# EAGLE board 15V Power Supply (EAGLE 9.1.1)
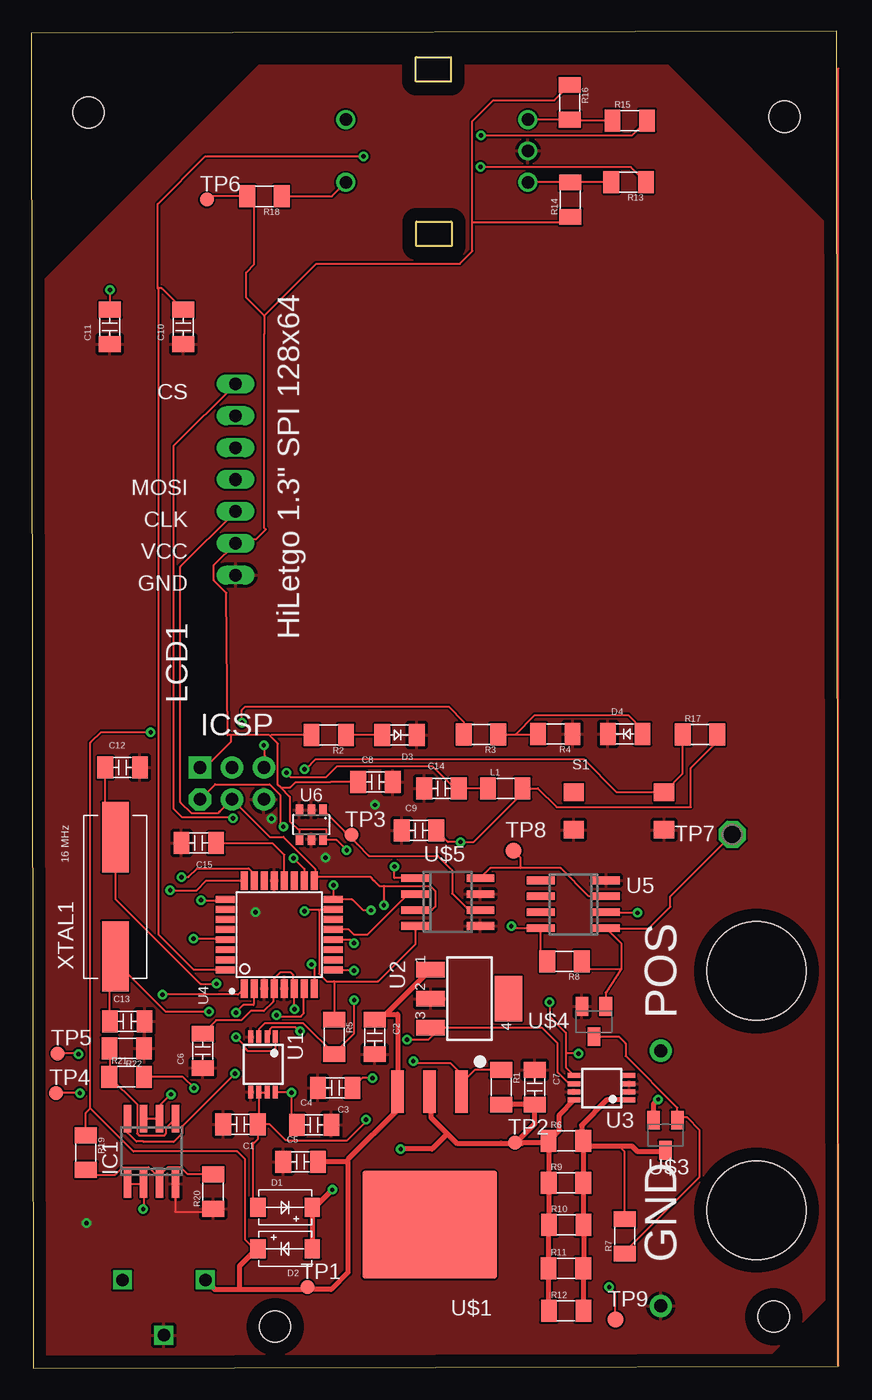
[diagram p0: board, top side]
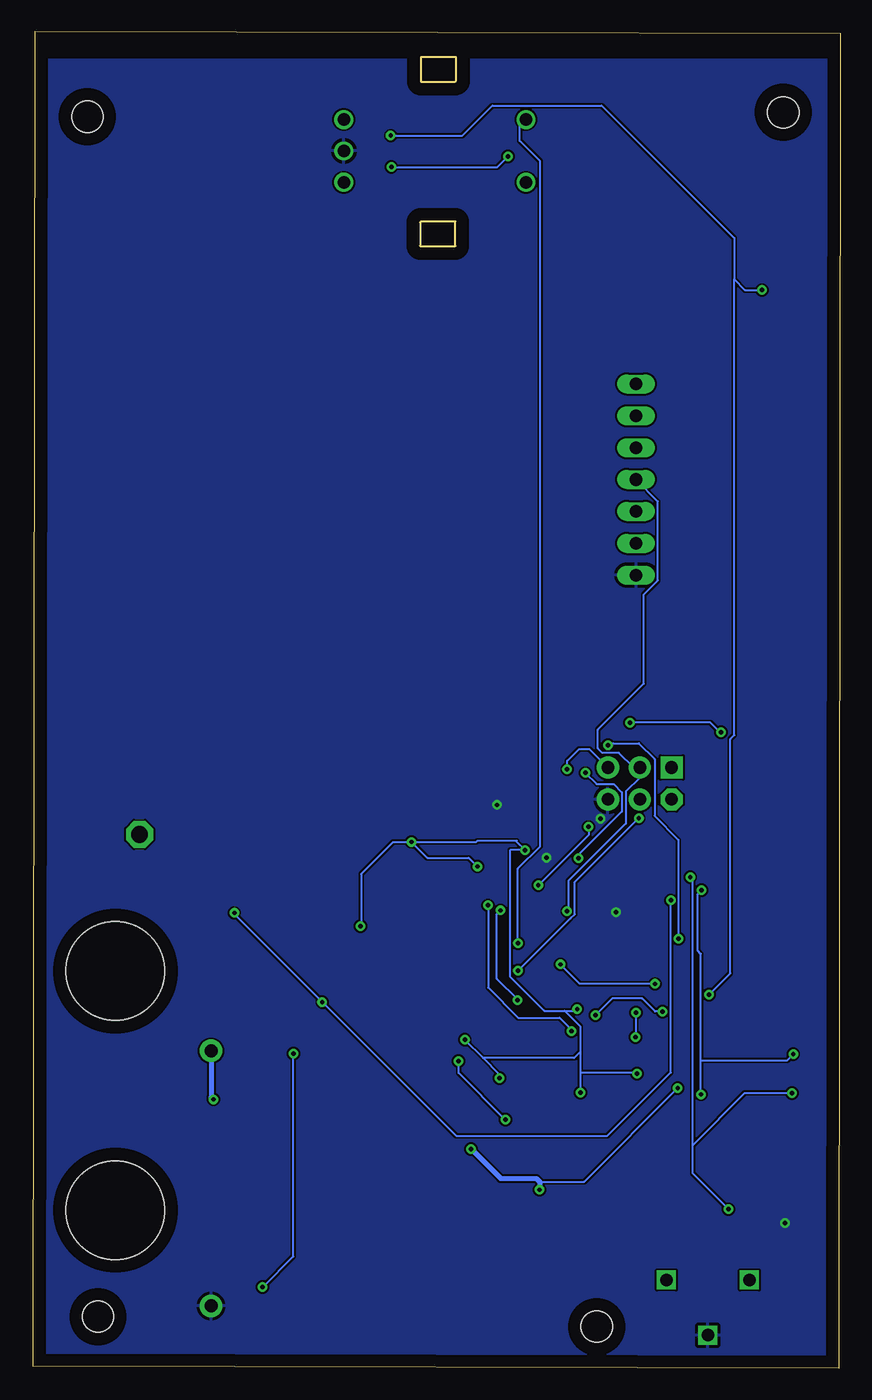
[diagram p1: board, bottom side, seen from below]

Size 64.25 x 106.45 mm. Coordinates in mm from the lower left corner, seen from the top.
Outline: 0.15,0 64.25,0.15 64.1,106.45 0,106.3 0.15,0
Copper layers (1*16): Top 0.035mm / dielectric 1.5mm / Bottom 0.035mm
Design rules "default *": minimum track width 3.5mil, minimum drill 0.2mm, track to track 6mil, track to pad 6mil, pad to pad 6mil, via to via 6mil, smd to smd 6mil, copper to edge 40mil, drill to drill 6mil, minimum pad ring 10mil, minimum via ring 8mil, stop-mask expansion 4mil, vias tented up to drill 0mil, thermal gap 10mil
Holes 2.5 mm at 4.55,100 59.95,99.65 59.1,4.1 19.4,3.3

## Footprints (pad centres in the part's own frame; a part is rotated, then mirrored left to right if it is on the bottom)
2.1BARRELJACK = drill 1 square: GND$1 4.4,0; GND$2 0,-3.3; POS 0,3.3
1206CAP = smd 1.25 x 1.75: P$1 1.375,0; P$2 -1.375,0
DO-221AC-2 = smd 1.2 x 1.52: A$1 -2.16,0; C$1 2.16,0
1206 = smd 1.25 x 1.75: P$1 1.375,0; P$2 -1.375,0
SO08 = smd 0.6 x 2.2: 1 -1.905,-2.6; 2 -0.635,-2.6; 3 0.635,-2.6; 4 1.905,-2.6; 5 1.905,2.6; 6 0.635,2.6; 7 -0.635,2.6; 8 -1.905,2.6
HILETGOSPILCD = drill 1 long: CLK -2.54,2.54; CS 7.62,2.54; DC 5.08,2.54; GND -7.62,2.54; P$1.MOSI 0,2.54; RES 2.54,2.54; VCC -5.08,2.54
TL3305 = smd 1.6 x 1.4: P$1 -3.6,-1.5; P$2 3.6,-1.5; P$3 -3.6,1.5; P$4 3.6,1.5
TP11R = smd 1.1 x 1.1: TP 0,0
P1-13 = drill 1.321 pad 2.159 octagon: TP 0,0
B1,27 = smd 1.27 x 1.27: TP 0,0
DGK_S-PDSO-G8 = smd 0.4 x 1: 1 -0.975,-2.2; 2 -0.325,-2.2; 3 0.325,-2.2; 4 0.975,-2.2; 5 0.975,2.2; 6 0.325,2.2; 7 -0.325,2.2; 8 -0.975,2.2
SOT223 = smd 1.219 x 2.235: 1 -2.311,-3.099; 2 0,-3.099; 3 2.311,-3.099 | smd 3.6 x 2.2: 4 0,3.099
QFP80P900X900X120-32N = smd 1.5 x 0.55: 1 -4.3,2.8; 2 -4.3,2; 3 -4.3,1.2; 4 -4.3,0.4; 5 -4.3,-0.4; 6 -4.3,-1.2; 7 -4.3,-2; 8 -4.3,-2.8; 17 4.3,-2.8; 18 4.3,-2; 19 4.3,-1.2; 20 4.3,-0.4; 21 4.3,0.4; 22 4.3,1.2; 23 4.3,2; 24 4.3,2.8 | smd 0.55 x 1.5: 9 -2.8,-4.3; 10 -2,-4.3; 11 -1.2,-4.3; 12 -0.4,-4.3; 13 0.4,-4.3; 14 1.2,-4.3; 15 2,-4.3; 16 2.8,-4.3; 25 2.8,4.3; 26 2,4.3; 27 1.2,4.3; 28 0.4,4.3; 29 -0.4,4.3; 30 -1.2,4.3; 31 -2,4.3; 32 -2.8,4.3
SO8 = smd 0.6 x 2.2: 1 -1.905,-2.6; 2 -0.635,-2.6; 3 0.635,-2.6; 4 1.905,-2.6; 5 1.905,2.6; 6 0.635,2.6; 7 -0.635,2.6; 8 -1.905,2.6
SOT23-6 = smd 0.6 x 0.9: 1 -0.95,-1.15; 2 0,-1.15; 3 0.95,-1.15; 4 0.95,1.15; 5 0,1.15; 6 -0.95,1.15
LM317KTTR = smd 1 x 3.4: ADJ -2.54,-10.6; IN 2.54,-10.6; OUT 0,-10.6 | smd 10.7 x 8.6: THEPAD 0,0
PEC11R-4 = drill 1: GND 0,-7.5; S$1 -2.5,7; S$2 2.5,7; TERA -2.5,-7.5; TERB 2.5,-7.5
SC59-EBC = smd 1 x 1.5: B -0.95,-1.2; C 0,1.2; E 0.95,-1.2
ISCP-PORT = drill 1 pad 1.778 octagon: P$1 -2.54,0 | drill 1 pad 1.778 square: P$2 -2.54,2.54 | drill 1 pad 1.778: P$3 0,0; P$4 0,2.54; P$5 2.54,2.54; P$6 2.54,0
CT2232 = drill 1.029 pad 1.778: GND 16.51,-7.62; P$1 -3.81,-7.62 | hole 7.874: -10.16,0; 8.89,0
HC/49US = smd 5.6 x 2.1: P$1 -4.75,0; P$2 4.75,0

## Placement (x,y rotation side)
B1  15V  [2.1BARRELJACK]  10.55,7.02 270 top
C1  .1u  [1206CAP]  16.65,19.42 180 top
C2  .1u  [1206CAP]  27.32,26.37 270 top
C3  22u  [1206CAP]  24.19,22.32 180 top
C4  .1u  [1206CAP]  22.51,19.37 0 top
C5  .1u  [1206CAP]  21.43,16.42 0 top
C6  .1u  [1206CAP]  13.65,25.27 90 top
C7  1u  [1206CAP]  40.07,22.37 270 top
C8  1u  [1206CAP]  27.39,46.67 0 top
C9  .1u  [1206CAP]  30.86,42.82 0 top
C10  .1u  [1206CAP]  12.08,82.92 90 top
C11  .1u  [1206CAP]  6.25,82.92 90 top
C12  22p  [1206CAP]  7.26,47.82 0 top
C13  22p  [1206CAP]  7.63,27.62 0 top
C14  .1u  [1206CAP]  32.65,46.17 0 top
C15  .1u  [1206CAP]  13.32,41.82 180 top
D1  VS-2EJH01HM3  [DO-221AC-2]  20.2,12.8 0 top
D2  VS-2EJH01HM3  [DO-221AC-2]  20.2,9.5 180 top
D3  [1206]  29.3,50.41 180 top
D4  [1206]  47.27,50.51 0 top
IC1  LM1458D  [SO08]  9.57,17.28 0 top
L1  1206-INDUCTOR  [1206]  37.73,46.17 0 top
LCD1  HILETGOSPILCD  [HILETGOSPILCD]  18.8,70.76 90 top
R1  590  [1206]  37.4,22.37 270 top
R2  1k  [1206]  23.67,50.42 180 top
R3  1K  [1206]  35.79,50.47 180 top
R4  500  [1206]  41.71,50.5 180 top
R5  1k  [1206]  24.1,26.38 270 top
R6  .5  [1206]  42.55,18.1 0 top
R7  1k  [1206]  47.22,10.5 90 top
R8  5k  [1206]  42.44,32.4 180 top
R9  .5  [1206]  42.56,14.75 0 top
R10  .5  [1206]  42.58,11.4 0 top
R11  .5  [1206]  42.55,7.95 0 top
R12  .5  [1206]  42.57,4.55 0 top
R13  10k  [1206]  47.54,94.45 180 top
R14  10k  [1206]  42.91,93.05 90 top
R15  10k  [1206]  47.63,99.35 0 top
R16  10k  [1206]  42.85,100.8 270 top
R17  2k  [1206]  53.22,50.45 0 top
R18  10k  [1206]  18.56,93.31 180 top
R19  [1206]  4.34,17.16 270 top
R20  [1206]  14.46,14.06 90 top
R21  [1206]  7.58,23.21 0 top
R22  [1206]  7.6,25.46 180 top
S1  TL3305  [TL3305]  46.76,44.36 0 top
TP1  TPTP11R  [TP11R]  21.96,6.46 0 top
TP2  TPTP11R  [TP11R]  38.48,17.96 0 top
TP3  TPTP11R  [TP11R]  25.5,42.46 0 top
TP4  TPTP11R  [TP11R]  1.97,21.91 0 top
TP5  TPTP11R  [TP11R]  2.09,25.06 0 top
TP6  TPTP11R  [TP11R]  13.96,93.06 0 top
TP7  TPPAD1-13  [P1-13]  55.79,42.5 0 top
TP8  TPB1,27  [B1,27]  38.36,41.2 0 top
TP9  TPB1,27  [B1,27]  46.48,3.85 0 top
U1  MCP4151T-502E/MS  [DGK_S-PDSO-G8]  18.44,24.19 180 top
U2  MCP5209-5.0YS  [SOT223]  34.87,29.42 270 top
U3  AD8418BZR  [DGK_S-PDSO-G8]  45.39,22.32 90 top
U4  ATMEGA328PB-AN  [QFP80P900X900X120-32N]  19.73,34.52 90 top
U5  LM393  [SO8]  43.15,36.93 90 top
U6  MCP1501T-40E/CHY  [SOT23-6]  22.28,43.28 180 top
U$1  LM317KTTR  [LM317KTTR]  31.7,11.42 180 top
U$2  PEC11R  [PEC11R-4]  32.03,96.93 90 top
U$3  DS31830  [SC59-EBC]  50.48,18.55 180 top
U$4  MMBT3904  [SC59-EBC]  44.77,27.6 180 top
U$5  MCP4921-E/SN  [SO8]  33.14,37.12 270 top
U$6  ICSP-HEADER  [ISCP-PORT]  15.97,45.29 0 top
U$7  BINDINGPOST  [CT2232]  57.72,21.46 270 top
XTAL1  16 MHz  [HC/49US]  6.68,37.53 90 top

## Library data of the parts
B1 = Booster Parts
C1-C15 = 1206CAP
D1 D2 U1 U$1 U$3 U$4 U$7 = LM317
D3 D4 = 1206LED
IC1 = linear
L1 LCD1 S1 U2 U3 U5 U6 U$2 U$5 U$6 XTAL1 = ATMEGA328PB-AN
R1-R22 = 1206 Resistor
TP1-TP9 = testpad
U4 = ATMEGA328PB-AN; AVAILABILITY: Good; DESCRIPTION: AVR microcontroller; EEPROM: 1024B; SRAM: 2kB; Flash: 32kB; TQFP32; MF: Microchip; MP: ATMEGA328PB-AN; PACKAGE: TQFP-32 Microchip; PRICE: 1.36 USD

## Nets
5V: C3.P$2 C4.P$2 C6.P$1 C8.P$2 C9.P$1 IC1.8 L1.P$1 LCD1.VCC R2.P$1 R8.P$1 R14.P$2 R16.P$2 R17.P$1 R18.P$1 TP6.TP U1.8 U2.3 U3.6 U4.4 U4.6 U5.8 U6.4 U6.6 U$5.1 U$6.P$2
15V: B1.POS C2.P$2 C5.P$1 D2.C$1 R3.P$1 R19.P$2 TP1.TP U2.1 U$1.IN
BASE: R8.P$2 TP7.TP U5.1 U$4.B
CS1: U1.1 U4.2
CS2: U4.13 U$5.2
CS3: LCD1.CS U4.9
CUR: TP9.TP U3.5 U4.25 U5.2
ENCODE-A: C10.P$1 R13.P$2 U4.32
ENCODE-B: C11.P$1 R15.P$1 U4.1
GND: B1.GND$1 C1.P$1 C2.P$1 C3.P$1 C4.P$1 C5.P$2 C6.P$2 C7.P$2 C8.P$1 C9.P$2 C10.P$2 C11.P$2 C12.P$1 C13.P$1 C14.P$2 C15.P$1 D3.P$2 D4.P$2 IC1.4 LCD1.GND R4.P$2 R20.P$2 R22.P$2 S1.P$1 S1.P$2 U1.4 U1.5 U2.2 U3.2 U3.3 U3.7 U4.3 U4.5 U4.21 U5.4 U6.2 U6.3 U6.5 U$2.GND U$4.E U$5.5 U$5.7 U$6.P$6 U$7.GND
MOSI: LCD1.P$1.MOSI R5.P$2 U4.15 U$5.4 U$6.P$4
N$1: D4.P$1 R3.P$2 R4.P$1
N$2: U$3.E U$7.P$1
N$3: C1.P$2 D1.A$1 R1.P$2 U1.6 U1.7 U$1.ADJ
N$4: TP3.TP U6.1 U$5.6
N$6: D3.P$1 R2.P$2
N$7: C14.P$1 L1.P$2 U4.18
N$8: C13.P$2 U4.7 XTAL1.P$1
N$9: TP8.TP U5.3 U$5.8
N$10: R6.P$1 R7.P$1 R9.P$1 R10.P$1 R11.P$1 R12.P$1 U3.1 U$3.C
N$11: R13.P$1 R14.P$1 U$2.TERA
N$12: R15.P$2 R16.P$1 U$2.TERB
N$13: C12.P$2 U4.8 XTAL1.P$2
N$14: R7.P$2 U$3.B U$4.C
N$16: C15.P$2 U4.20
N$18: R18.P$2 U$2.S$1
N$20: IC1.3 R19.P$1 R20.P$1
N$22: IC1.5 R21.P$2 R22.P$1
OP15: IC1.1 IC1.2 TP4.TP U4.23
OPOUT: IC1.6 IC1.7 TP5.TP U4.24
OUT: C7.P$1 D1.C$1 D2.A$1 R1.P$1 R6.P$2 R9.P$2 R10.P$2 R11.P$2 R12.P$2 R21.P$1 TP2.TP U3.8 U$1.OUT
RESET: R17.P$2 S1.P$4 U4.29 U$6.P$5
SCK: LCD1.CLK U1.2 U4.17 U$5.3 U$6.P$3
SDO/SDI: R5.P$1 U1.3 U4.16 U$6.P$1
SW1: U4.12 U$2.S$2

## Tracks (layer width: path | path; a pad name or v marks a point on that pad's centre or on a via)
5V  (via drill 0.35)
  Top 0.152: v20.95,28.6 20.93,28.62 U4.6 20.85,30.3 20.85,31.3 20.65,31.5 19.8,31.5 19.33,31.03 U4.4 19.23,30.12 19.23,29.16 18.51,28.44 17.45,28.44 16.7,27.7 14.75,27.7 | 21.33,42.8 21.33,42.9 23.5,42.9 23.5,42.4 U6.6 23.31,42.05 24.3,42.05 v25.1,41.25 | 21.33,42.8 U6.4 | U$5.1 28.9,39.02 v28.9,39.95 | v29.9,26.15 31.57,26.15 32.53,27.11 U2.3 40.65,27.1 41.9,25.85 41.9,23.55 42.8,22.64 U3.6 | v38.2,35.2 38.38,35.02 U5.8 40.55,32.91 R8.P$1 | U1.8 19.45,21.95 v20.7,21.95 20.7,19.8 C4.P$2 | 19.84,46.24 20.58,45.5 20.58,43.55 21.33,42.8 | 19.84,46.24 19.63,46.45 19.63,49.73 19.03,50.33 | 19.03,50.33 18.95,50.41 15.91,50.41 | v27.15,23.1 26.34,23.1 C3.P$2 | U$6.P$2 13.83,47.83 15.91,49.91 15.91,50.41 | R16.P$2 41.62,100.95 36.75,100.95 35.1,99.3 35.1,91.2 | 19.84,46.24 20.6,46.24 21.03,46.67 23.83,46.67 C8.P$2 | C9.P$1 33.16,41.9 v34.15,41.9 35.2,41.9 39.1,45.8 L1.P$1 40.33,46.17 41.81,44.68 52.49,44.68 52.49,47.8 54.59,49.9 R17.P$1 | 18.54,83.8 18.54,82.35 18.54,66.91 18.66,66.78 17.86,65.98 16.56,65.98 LCD1.VCC 14.52,63.94 14.52,62.73 15.52,61.74 15.62,50.41 15.91,50.41 | 35.1,91.2 35.1,88.95 34.1,87.95 22.68,87.95 18.54,83.8 | 18.54,83.8 17.08,85.25 17.08,87.25 17.73,87.9 17.73,93.86 R18.P$1 14.21,93.31 TP6.TP | R2.P$1 19.12,50.42 19.03,50.33 | 42.43,91.2 R14.P$2 42.43,91.2 | 14.75,27.7 | 14.75,27.7 14.7,27.7 | 14.14,27.14 C6.P$1 14.7,27.7 | v16.2,23.45 12,19.25 12,18.68 11.32,18 8.95,18 8.9,18.05 8.35,18.05 7.67,18.73 IC1.8 | 14.75,27.7 14.7,27.7 | 42.43,91.2 35.1,91.2
  Bottom 0.152: 21.95,28.45 21.1,28.45 v20.95,28.6 | 21.95,28.45 20.7,27.2 20.7,25.2 | 20.7,25.2 20.7,23.55 | 20.7,23.55 v20.7,21.95 | v34.15,41.9 35.6,41.9 38.15,39.35 38.15,35.25 v38.2,35.2 | v34.15,41.9 29,41.9 28.9,42 28.7,42 25.75,42 25.75,41.9 v25.1,41.25 26.27,41.25 26.27,31.15 23.57,28.45 21.95,28.45 | 28.45,24.7 21.2,24.7 20.7,25.2 | 28.45,24.7 v29.9,26.15 | 28.45,24.7 | 28.45,24.7 27.15,23.4 v27.15,23.1 | v34.15,41.9 32.89,40.64 29.59,40.64 v28.9,39.95 | 20.7,23.55 16.3,23.55 v16.2,23.45
15V  (via drill 0.35)
  Top 0.152: TP1.TP 22.05,6.37 22.05,6.27 | 17.88,9.34 17.83,9.39 17.01,10.22 17.01,16.62 16.37,17.26 8.12,17.26 4.7,20.68 | 4.7,20.68 4.7,49.81 5.54,50.65 v9.5,50.65 | R19.P$2 4.34,20.32 4.7,20.68 | R3.P$1 34.41,51.47 33.21,52.67 17.02,52.67 16.75,52.4 v16.75,51.4 | 25.2,16.61 25.2,16.42
  Top 0.406: 28.21,28.17 U2.1 | 16.55,6.27 14.6,6.27 B1.POS | 16.55,6.27 22.05,6.27 23.85,6.27 25.2,7.62 25.2,16.42 C5.P$1 | 25.2,16.61 29.16,20.57 U$1.IN 29.16,28.17 28.21,28.17 | C2.P$2 27.74,28.17 28.21,28.17 | D2.C$1 17.88,9.34 | 16.55,6.27 16.55,8.11 17.83,9.39
  Bottom 0.152: v16.75,51.4 10.35,51.4 9.6,50.65 v9.5,50.65
BASE
  Top 0.152: 46.95,31.79 45.72,29.88 U$4.B | 46.95,31.79 46.95,33.83 U5.1 49.15,35.02 50.87,36.74 50.87,37.58 TP7.TP | R8.P$2 44.43,31.79 46.95,31.79
CS1  (via drill 0.35)
  Top 0.152: U1.1 19.41,25.41 19.27,25.27 17.19,25.27 16.93,25.53 16.93,25.72 v16.3,26.35 | v16.28,28.32 16.88,28.92 17.68,28.92 17.73,28.97 U4.2
  Bottom 0.152: v16.28,28.32 16.3,28.3 v16.3,26.35
CS2
  Top 0.152: U4.13 25.28,34.92 25.7,34.51 26.74,34.51 29.99,37.76 U$5.2
CS3  (via drill 0.35)
  Top 0.152: LCD1.CS 11.35,73.47 11.35,44.52 12,43.87 15.98,43.87 v16.05,43.8 | U4.9 25.6,31.72 v25.67,31.65
  Bottom 0.152: v25.67,31.65 21.52,35.79 21.5,35.79 21.14,36.15 21.14,38.73 16.2,43.67 16.18,43.67 v16.05,43.8
CUR  (via drill 0.35)
  Top 0.152: 42.54,25.05 42.54,26.71 41.25,28 v41.25,29.15 | 42.54,25.05 42.54,23.95 U3.5 | v13.5,37.25 15.36,37.25 U4.25 | v48.25,36.25 45.8,36.25 U5.2 | TP9.TP 46.48,5.97 v46,6.45 | v43.55,25.05 42.54,25.05
  Bottom 0.152: v13.5,37.25 13.5,23.55 18.55,18.5 30.6,18.5 v41.25,29.15 48.25,36.15 v48.25,36.25 | v46,6.45 43.55,8.9 v43.55,25.05
ENCODE-A  (via drill 0.35)
  Top 0.152: U4.32 12.92,31.72 10.15,34.49 10.15,86 | R13.P$2 47.71,95.65 v35.75,95.65 | v26.45,96.5 13.85,96.5 10.05,92.7 10.05,86 10.15,86 | C10.P$1 10.38,86 10.15,86
  Bottom 0.152: v35.75,95.65 27.3,95.65 v26.45,96.5
ENCODE-B  (via drill 0.35)
  Top 0.152: U4.1 16.46,29.75 v10.45,29.75 | R15.P$1 47.8,98.15 v35.8,98.15 | v6.25,85.85 C11.P$1
  Bottom 0.152: v35.8,98.15 30.1,98.15 27.7,100.55 19,100.55 8.45,90 8.45,86.7 | v10.45,29.75 8.75,31.45 8.75,50.1 8.45,50.4 8.45,86.7 | 8.45,86.7 7.6,85.85 v6.25,85.85
GND  (via drill 0.35)
  Top 0.152: IC1.4 11.45,14.65 11.45,12.45 14.22,12.45 R20.P$2
  other vias: 19.1,43.75 27.35,44.85 4.4,11.55 17.85,36.3 23.4,40.65
  pour Top: 0.35,0.2 57.95,0.2 64.05,6.3 64.05,90.35 50.7,103.7 18.1,103.7 0.35,85.95 0.35,0.4
  pour Bottom: 64.35,104.2 64.7,103.85 64.7,0.4 64.5,0.2 0.55,0.2 0.35,0 0.35,103.85 0.85,104.2
MOSI  (via drill 0.35)
  Top 0.152: 24.1,30.8 23.5,30.8 22.9,31.4 22.9,36.4 23.02,36.52 U4.15 21.87,36.52 v21.75,36.4 | 24.1,30.8 27.6,30.8 30.54,33.74 U$5.4 | 24.1,30.8 R5.P$2
  Bottom 0.152: LCD1.P$1.MOSI 14.52,69.02 14.52,62.73 15.65,61.61 15.65,54.51 19.31,50.85 19.31,49.35 18.95,48.99 17.63,48.99 16.47,47.83 U$6.P$4 15.95,47.81 15.95,47.04 17.09,45.9 17.09,43.36 21.65,38.8 21.65,36.5 v21.75,36.4
N$1
  Top 0.152: R3.P$2 38.55,50.47 | 38.55,50.47 40.3,50.47 R4.P$1 | 38.55,50.47 40.08,52 47.5,52 48.64,50.85 D4.P$1
N$2  (via drill 0.35)
  Top 0.406: U$3.E 49.53,21.03 v49.9,21.4
  Bottom 0.406: U$7.P$1 50.1,21.6 v49.9,21.4
N$3  (via drill 0.35)
  Top 0.152: U1.7 18.8,21.95 18.15,21.95 U1.6 18.11,19.33 C1.P$2 | 34.24,22.7 34.24,23.41 33.35,24.3 30.55,24.3 v30.4,24.45 | 34.24,22.7 U$1.ADJ | v26.65,19.8 26.65,19.65 25.15,18.15 20.35,18.15 20.23,18.15 18.96,19.42 C1.P$2 | D1.A$1 17.64,13.2 17.64,17.95 17.69,17.9 18.02,18.23 C1.P$2 | R1.P$2 35.28,23.75 34.24,22.7
  Bottom 0.152: v30.4,24.45 30.4,23.5 26.72,19.82 26.7,19.8 v26.65,19.8
N$4
  Top 0.152: U$5.6 34.81,36.48 34.63,36.67 33.5,37.8 33.5,39.65 32.35,40.8 26.86,40.8 25.93,41.73 24.93,42.73 | U6.1 24.93,42.73 | TP3.TP 25.2,42.46 24.93,42.73
N$5
  Top 0.152: 64.25,0.2 64.25,103.5
N$6
  Top 0.152: D3.P$1 R2.P$2
N$7  (via drill 0.35)
  Top 0.152: L1.P$2 C14.P$1 33.7,46.17 31.95,47.92 24.32,47.92 23.45,47.05 20.65,47.05 v20.3,47.4 | U4.18 21.73,39.76 20.9,40.59 v20.85,40.59
  Bottom 0.152: v20.85,40.59 20.85,40.87 17.39,44.33 17.39,45.85 18.05,46.51 19.41,46.51 v20.3,47.4
N$8  (via drill 0.35)
  Top 0.152: U4.7 21.7,30.19 21.7,28.25 21.45,28 21.21,28 21.2,27.99 19.61,27.99 v19.5,28.1 | C13.P$2 6.26,32.35 XTAL1.P$1 6.68,32.38 10.66,28.4 v14.15,28.4
  Bottom 0.152: v14.15,28.4 14.75,28.4 15.78,29.43 18.17,29.43 v19.5,28.1
N$9
  Top 0.152: U$5.8 36.54,39.83 38.95,39.83 | U5.3 44.38,37.56 42.12,39.83 38.95,39.83 | 38.95,39.83 38.95,40.61 TP8.TP
N$10
  Top 0.152: R7.P$1 47.22,17.23 46.75,17.7
  Top 0.406: U3.1 45.8,21.34 43.8,19.35 43.8,18.23 R6.P$1 | R6.P$1 R9.P$1 43.93,11.42 R10.P$1 43.95,7.98 R11.P$1 43.92,4.57 R12.P$1 | U$3.C 50.58,17.25 48.24,17.25 47.8,17.7 46.75,17.7 44.32,17.7 R6.P$1
N$11
  Top 0.152: U$2.TERA R14.P$1 42.93,94.45 R13.P$1
N$12
  Top 0.152: R15.P$2 42.92,99.35 R16.P$1 U$2.TERB
N$13  (via drill 0.35)
  Top 0.152: C12.P$2 5.89,43.08 XTAL1.P$2 6.68,37.38 13.46,30.6 v14.75,30.6 | v22.29,32.15 22.53,31.91 U4.8
  Bottom 0.152: v14.75,30.6 20.74,30.6 v22.29,32.15
N$14
  Top 0.152: U$4.C 46.76,26.4 47.31,25.85 47.31,24.84 51.43,20.73 51.43,19.95 | U$3.B 51.43,19.95 | R7.P$2 47.22,9.27 53.2,15.25 53.2,18.95 52.2,19.95 51.43,19.95
N$16
  Top 0.152: C15.P$2 14.71,41.8 19.2,41.8 20.13,40.87 U4.20
N$18
  Top 0.152: R18.P$2 23.91,93.31 U$2.S$1
N$20
  Top 0.152: R19.P$1 4.73,15.4 6.66,15.4 7.27,16.01 9.33,16.01 9.94,15.4 10.25,15.4 | 10.25,15.4 10.25,14.72 IC1.3 | R20.P$1 12.44,15.44 11.87,16.01 10.86,16.01 10.25,15.4
N$22
  Top 0.152: R22.P$1 6.23,23.23 R21.P$2 8.41,21.01 8.41,18.68 8.54,18.55 10.6,18.55 10.73,18.68 10.73,19.14 IC1.5
OP15  (via drill 0.35)
  Top 0.152: IC1.1 IC1.2 8.94,12.69 v8.9,12.65 | U4.23 17.73,39.37 17.3,39.8 13.2,39.8 12.5,39.1 v11.95,39.1 | v3.85,21.9 TP4.TP
  Bottom 0.152: v8.9,12.65 11.75,15.5 11.75,17.75 | 11.75,17.75 11.75,38.9 v11.95,39.1 | 11.75,17.75 7.6,21.9 v3.85,21.9
OPOUT  (via drill 0.35)
  Top 0.152: IC1.7 IC1.6 10.21,20.91 v11.1,21.8 | U4.24 13.93,38.82 13.15,38.04 v11.06,38.04 v11.05,38.05 | v3.75,25 3.69,25.06 TP5.TP
  Bottom 0.152: v11.1,21.8 11.1,24.5 | 11.1,24.5 11.1,33 11.35,33.25 11.35,37.75 v11.05,38.05 | 11.1,24.5 4.25,24.5 v3.75,25
OUT  (via drill 0.35)
  Top 0.152: v12.95,22.3 12.04,23.21 R21.P$1
  Top 0.406: U$1.OUT 31.8,21.92 31.8,19.95 33.1,18.65 | 33.1,18.65 33.85,17.9 37.4,17.9 38.5,17.9 | R12.P$2 41.2,7.93 R11.P$2 41.17,11.23 41.1,11.3 R10.P$2 41.2,14.35 | 41.2,14.35 41.2,14.73 R9.P$2 | R6.P$2 41.17,14.38 41.2,14.35 | 38.5,17.9 39.11,17.9 39.16,17.95 39.15,17.96 TP2.TP 41.03,17.96 R6.P$2 | D2.A$1 D1.C$1 22.55,12.8 v23.95,14.2 | 33.1,18.65 31.9,17.45 v29.4,17.45 | 38.5,17.9 40.07,19.47 C7.P$1 R1.P$1 | R6.P$2 42.02,18.95 42.02,20.18 U3.8
  Bottom 0.152: 23.95,14.85 20.4,14.85 v12.95,22.3
  Bottom 0.406: v23.95,14.2 23.95,14.85 24.2,15.1 27.05,15.1 v29.4,17.45
RESET  (via drill 0.35)
  Top 0.152: v12.89,34.2 15.35,34.2 U4.29 | v18.5,49.6 18.59,49.51 18.59,48.74 18.6,48.75 18.6,47.92 U$6.P$5 | v21.75,47.7 v21.76,47.69 21.85,47.69 22.65,48.49 43.96,48.49 46.59,45.86 S1.P$4 51.84,47.34 R17.P$2
  Bottom 0.152: v12.89,34.2 12.89,42.07 14.8,43.98 14.8,48.5 16.05,49.75 18.1,49.75 18.25,49.6 v18.5,49.6 | U$6.P$5 19.98,49.3 20.8,49.3 21.75,48.35 v21.75,47.7
SCK  (via drill 0.35)
  Top 0.152: 22.58,38.87 22.81,39.1 27,39.1 27.3,38.8 27.7,38.4 28.05,38.4 | 22.58,38.87 U4.17 | 28.05,38.4 28.05,37.45 v28.05,36.85 | v21.4,26.83 21.32,26.83 21.03,27.12 19.12,27.12 18.99,26.98 18.99,26.61 U1.2 | 28.05,38.4 31.75,38.4 32.15,38 32.15,36.75 31.88,36.48 U$5.3 | 22.58,38.87 22.58,39.77 20.05,42.3 18.96,42.3 U$6.P$3 15,44.32 14.97,44.32 14.82,44.17 12.75,44.17 11.86,45.06 11.86,63.82 LCD1.CLK
  Bottom 0.152: v28.05,36.85 28.05,30.3 25.65,27.9 22.35,27.9 21.4,26.95 v21.4,26.83
SDO/SDI  (via drill 0.35)
  Top 0.152: v25.7,29.3 25.7,26.66 24.1,25.05 R5.P$1 21.69,27.41 21.69,27.4 21.65,27.44 18.56,27.44 18.11,26.99 U1.3 | v27.05,36.45 26.4,36.45 25.53,37.32 U4.16 24.03,38.43 v24.05,38.45 | U$6.P$1 14.63,46.49 18.96,46.49 19.8,45.65 19.8,43.35 v20.05,43.1
  Bottom 0.152: v24.05,38.45 20.05,42.45 v20.05,43.1 | v27.05,36.45 27.35,36.15 27.35,31 25.7,29.35 v25.7,29.3
SW1  (via drill 0.35)
  Top 0.152: U4.12 25.4,34.12 v25.67,33.85
  Bottom 0.152: v25.67,33.85 25.67,39.77 23.9,41.54 23.9,96.1 25.53,97.73 25.53,98.93 U$2.S$2